# Altium PCB РАЗВОДКА.PcbDoc (part 1 of 2)
Units mm, origin at the board's own origin, x right, y up, seen from the top; angles counter-clockwise.
Board outline 89.98 x 48.1 mm, 2 copper layers (Top Layer, Bottom Layer); 66 components, 44 nets, 297 pads, 65 vias.
Unrouted connection lines stored in the file: 12.
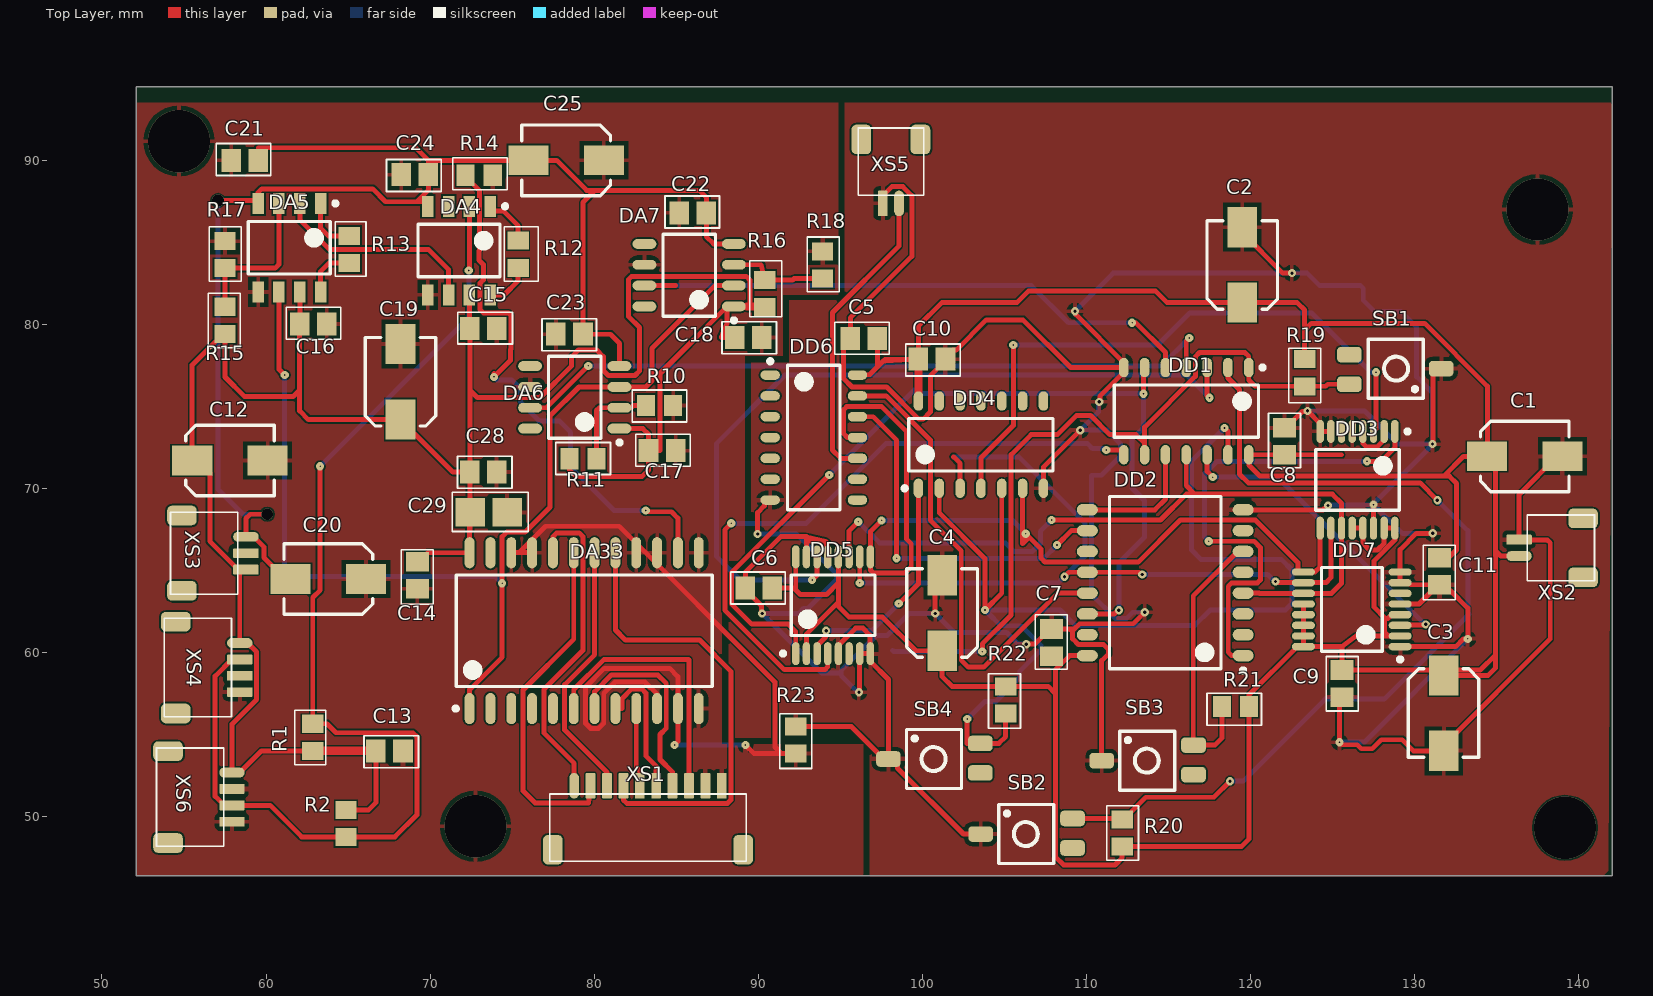
[diagram p0: Top Layer view]
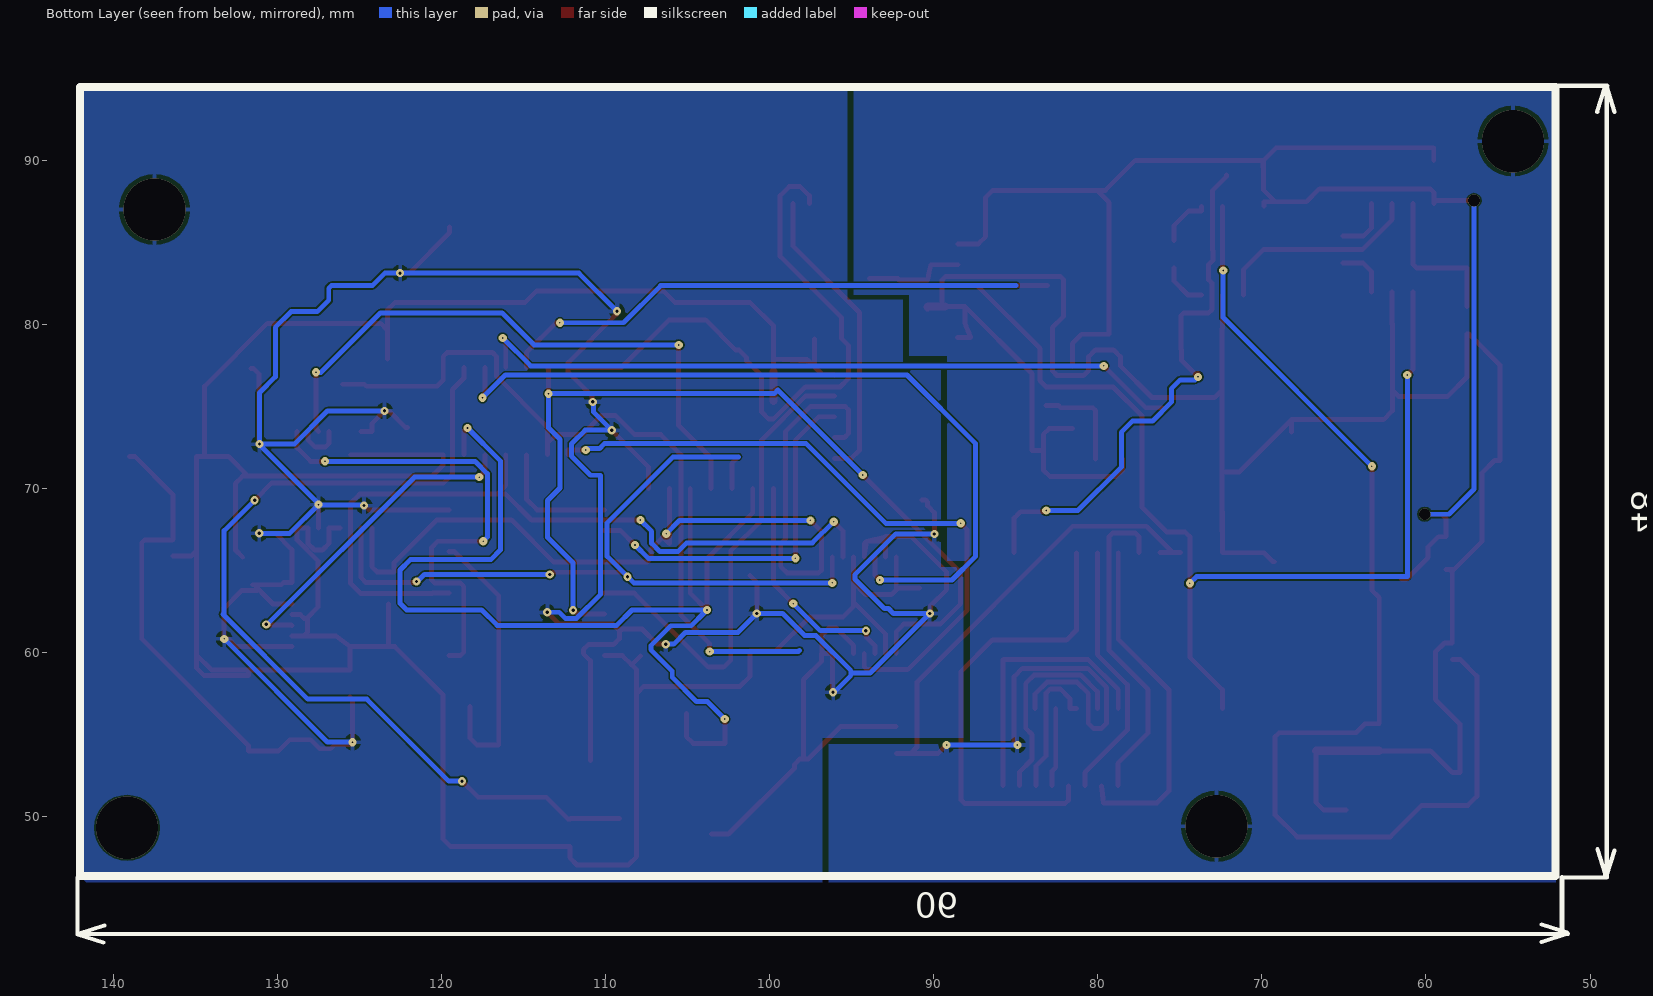
[diagram p1: Bottom Layer view, seen from below]
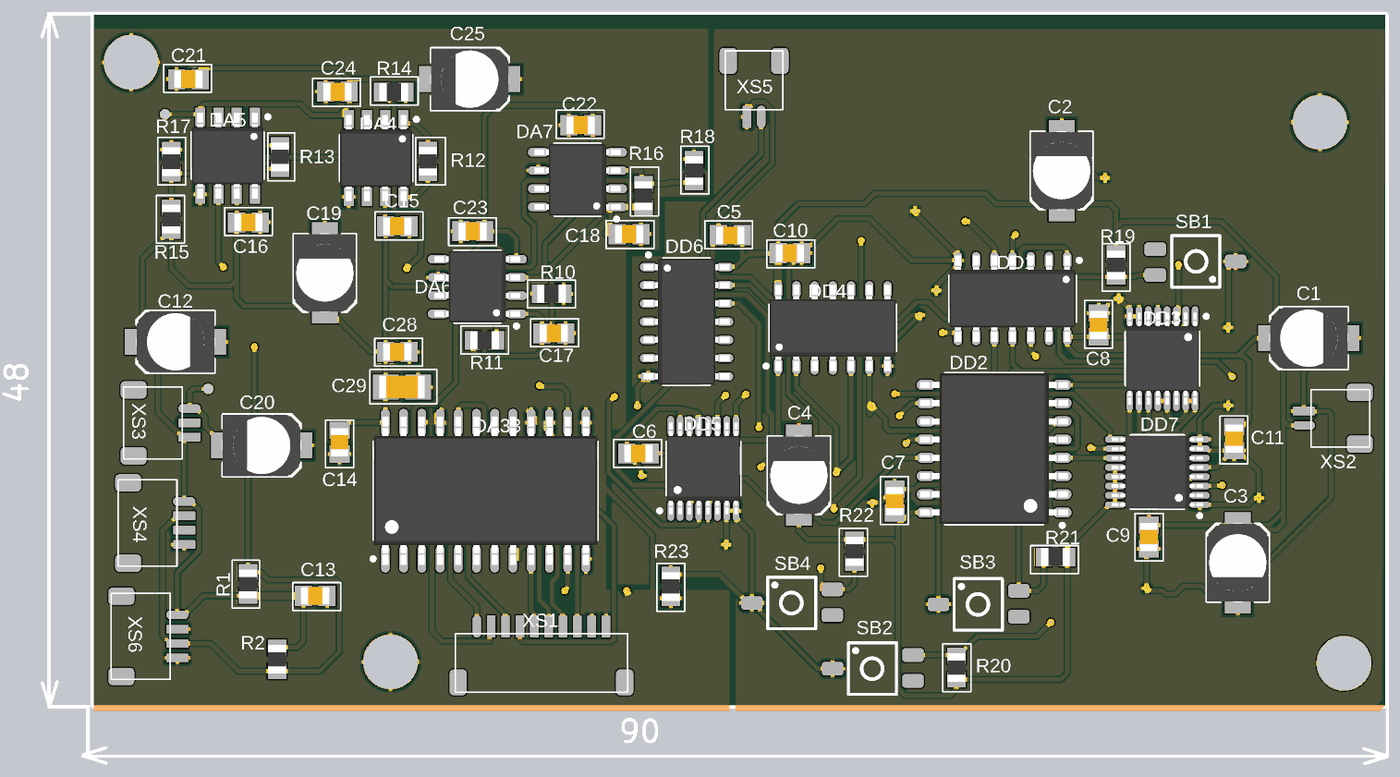
[diagram p3: 3D render of the assembled board from above, using the file's embedded part models]

## Layer stack, top to bottom
Top Solder: solder mask 0.0102, Solder Resist, Dk 3.5
Top Layer: signal copper 0.0356
Dielectric 1: dielectric 0.32, FR-4, Dk 4.8
Bottom Layer: signal copper 0.0356
Bottom Solder: solder mask 0.0102, Solder Resist, Dk 3.5

## Board outline
52.1,46.375 52.1,94.475 142.075,94.475 142.075,46.375

## Design rules (kind name [scope] priority, off if disabled: settings)
Clearance [All] p1: gap=0.1 ignorepadtopadclearanceinfootprint=FALSE except(0: Arc-Hole Track-Hole SMDPad-Hole THPad-Hole Via-Hole Fill-Hole Poly-Hole Region-Hole Text-Hole)
PolygonConnect [All] p1: connectstyle=Relief reliefconductorwidth=0.254 reliefentries=4 polygonreliefangle="90 Angle" airgapwidth=0.254
RoutingVias [All] p1: holewidth=0.1 width=1.27 viastyle="Through Hole" minholewidth=0.1 minwidth=0.1 maxholewidth=5 maxwidth=5
SolderMaskExpansion [All] p1: expansion=0.102 istentingtop=FALSE
Width [All] p1: maxlimit=1 minlimit=0.1 preferedwidth=0.3
30 further rules are at their usual default settings.

## Components (designator, comment, footprint, x,y, rotation, side; value= is the part's Value field where it differs from the comment)
C5 "0.1uF" "Кер.ЧИП конд. 0.1 мкФ X7R 50В 10% 0805" 96.45,79.125 r0 top
C6 "0.1uF" "Кер.ЧИП конд. 0.1 мкФ X7R 50В 10% 0805" 90.05,63.925 r0 top
C7 "0.1uF" "Кер.ЧИП конд. 0.1 мкФ X7R 50В 10% 0805" 107.9,60.6 r270 top
C8 "0.1uF" "Кер.ЧИП конд. 0.1 мкФ X7R 50В 10% 0805" 122.1,72.875 r270 top
C9 "0.1uF" "Кер.ЧИП конд. 0.1 мкФ X7R 50В 10% 0805" 125.6,58.1 r90 top
C10 "0.1uF" "Кер.ЧИП конд. 0.1 мкФ X7R 50В 10% 0805" 100.6,77.875 r180 top
C11 "0.1uF" "Кер.ЧИП конд. 0.1 мкФ X7R 50В 10% 0805" 131.55,64.95 r90 top
C13 "0.1uF" "Кер.ЧИП конд. 0.1 мкФ X7R 50В 10% 0805" 67.525,54 r180 top
C14 "0.1uF" "Кер.ЧИП конд. 0.1 мкФ X7R 50В 10% 0805" 69.225,64.7 r90 top
C15 "0.1uF" "Кер.ЧИП конд. 0.1 мкФ X7R 50В 10% 0805" 73.25,79.75 r180 top
C16 "0.1uF" "Кер.ЧИП конд. 0.1 мкФ X7R 50В 10% 0805" 62.875,80.025 r180 top
C17 "0.1uF" "Кер.ЧИП конд. 0.1 мкФ X7R 50В 10% 0805" 84.15,72.3 r180 top
C18 "0.1uF" "Кер.ЧИП конд. 0.1 мкФ X7R 50В 10% 0805" 89.4,79.2 r180 top
C21 "0.1uF" "Кер.ЧИП конд. 0.1 мкФ X7R 50В 10% 0805" 58.7,90 r180 top
C22 "0.1uF" "Кер.ЧИП конд. 0.1 мкФ X7R 50В 10% 0805" 86.025,86.8 r180 top
C23 "0.1uF" "Кер.ЧИП конд. 0.1 мкФ X7R 50В 10% 0805" 78.5,79.4 r180 top
C24 "0.1uF" "Кер.ЧИП конд. 0.1 мкФ X7R 50В 10% 0805" 69.075,89.125 r180 top
C28 "0.1uF" "Кер.ЧИП конд. 0.1 мкФ X7R 50В 10% 0805" 73.25,71 r180 top
C29 "47uF" "Кер.ЧИП конд. 47 мкФ X5R 20% 10В 1206" 73.575,68.55 r180 top
DA4 "INA118E_BB" "AD620 Инструмент.усилитель" 71.77,84.5 r270 top
DA5 "INA118E_BB_1" "AD620 Инструмент.усилитель" 61.425,84.675 r270 top
DA6 "AD8561" AD8561 78.825,75.55 r180 top
DA7 "AD8561" AD8561 85.8,83 r180 top
DA33 "AD7824" AD7824 79.4,61.325 r90 top
DD1 "И №1 (4 компонента)" 4x2И 116.11,74.71 r270 top
DD2 "НЕ №3 (4 компонента)" CD4044B 114.825,64.25 r180 top
DD3 "Мультиплексор" Мультиплексор 126.55,70.525 r270 top
DD4 "И №2 (2 компонента)" 4x2И 103.59,72.665 r90 top
DD5 "Мультиплексор" Мультиплексор 94.575,62.875 r90 top
DD6 "3И №1" 4x2И 93.4,73.1 r0 top
DD7 "Мультиплексор" Мультиплексор 126.2,62.625 r180 top
R1 "51k" "0.125Вт 0805 51 кОм, 5%, Чип резистор (SMD)" 62.85,54.825 r90 top
R2 "51k" "0.125Вт 0805 51 кОм, 5%, Чип резистор (SMD)" 64.875,49.575 r90 top
R10 "1.5k" "0.125Вт 0805 15Ом, 5%, Чип резистор (SMD)" 84,75.05 r180 top
R11 "8.2k" "0.125Вт 0805 82Ом, 5%, Чип резистор (SMD)" 79.325,71.8 r180 top
R12 "200k" "0.125Вт 0805 200 кОм, 5%, Чип резистор (SMD)" 75.375,84.275 r90 top
R13 "160k" "0.125Вт 0805 160 кОм, 5%, Чип резистор (SMD)" 65.075,84.575 r90 top
R14 "51k" "0.125Вт 0805 51 кОм, 5%, Чип резистор (SMD)" 73,89.1 r0 top
R15 "7.5k" "0.125Вт 0805 75Ом, 5%, Чип резистор (SMD)" 57.5,80.25 r90 top
R16 "1k" "0.125Вт 0805 91Ом, 5%, Чип резистор (SMD)" 90.4,81.875 r90 top
R17 "2.2k" "0.125Вт 0805 22Ом, 5%, Чип резистор (SMD)" 57.5,84.25 r270 top
R18 "56" "0.125Вт 0805 5.1Ом, 5%, Чип резистор (SMD)" 93.925,83.625 r270 top
R19 "10k" "0.125Вт 0805 3 кОм, 5%, Чип резистор (SMD)" 123.325,77.05 r90 top
R20 "10k" "0.125Вт 0805 3 кОм, 5%, Чип резистор (SMD)" 112.2,49 r270 top
R21 "10k" "0.125Вт 0805 3 кОм, 5%, Чип резистор (SMD)" 119.1,56.7 r0 top
R22 "10k" "0.125Вт 0805 3 кОм, 5%, Чип резистор (SMD)" 105.1,57.1 r90 top
R23 "0" "0.125Вт 0805 82Ом, 5%, Чип резистор (SMD)" 92.3,54.65 r270 top
SB1 "Выключатель кнопочный с замыкающим контактом" "Выключатель кнопочный ese21x" 128.9,77.3 r180 top
SB2 "Выключатель кнопочный с замыкающим контактом" "Выключатель кнопочный ese21x" 106.325,48.925 r0 top
SB3 "Выключатель кнопочный с замыкающим контактом" "Выключатель кнопочный ese21x" 113.7,53.4 r0 top
SB4 "Выключатель кнопочный с замыкающим контактом" "Выключатель кнопочный ese21x" 100.7,53.5 r0 top
XS1 "XS 10Pin" CI1108M1H 77.29,49.67 r0 top
XS2 "XS 2Pin (D)" "CI1102M1H  (F)" 138.6,64.375 r90 top
XS3 "XS 3Pin (A)" "CI1108M1H - duplicate" 56.575,68.55 r270 top
XS4 "XS Датчик" CI1102M1H 56.2,62.075 r270 top
XS5 "XS 2Pin_1" "CI1102M1H  (F)" 100.1,89.575 r180 top
XS6 "XS Датчик" CI1102M1H 55.725,54.175 r270 top
ZBOAS336489963 "Comment" "BOASVIEWassembly:Вид спереди для сборочного:4:1:0:101" 85.45,2285.075 r0 top
С1 "1uF" "ECAP SMD, 1 мкФ, 50В, Конденсатор электролитический алюминиевый SMD" 136.75,71.95 r0 top
С2 "1uF" "ECAP SMD, 1 мкФ, 50В, Конденсатор электролитический алюминиевый SMD" 119.525,83.625 r90 top
С3 "1uF" "ECAP SMD, 1 мкФ, 50В, Конденсатор электролитический алюминиевый SMD" 131.8,56.3 r270 top
С4 "1uF" "ECAP SMD, 1 мкФ, 50В, Конденсатор электролитический алюминиевый SMD" 101.225,62.4 r90 top
С12 "1uF" "ECAP SMD, 1 мкФ, 50В, Конденсатор электролитический алюминиевый SMD" 57.8,71.7 r0 top
С19 "1uF" "ECAP SMD, 1 мкФ, 50В, Конденсатор электролитический алюминиевый SMD" 68.2,76.5 r90 top
С20 "1uF" "ECAP SMD, 1 мкФ, 50В, Конденсатор электролитический алюминиевый SMD" 63.8,64.475 r180 top
С25 "1uF" "ECAP SMD, 1 мкФ, 50В, Конденсатор электролитический алюминиевый SMD" 78.3,90 r180 top

## Footprints (in the part's own frame and the unit in brackets; to place one, negate y for a bottom-side part, rotate by r counter-clockwise, add the part's x,y. Pads: shape width x height; smd on the part's side, far side on the other; paste and mask are expansions set on the pad)
"0.125Вт 0805 3 кОм, 5%, Чип резистор (SMD)" [mm]
  rect 1.1x1.3 smd: 1(-0.825,0) 2(0.825,0)
  body extent -1,-0.63 1,0.63, height 0.5
"0.125Вт 0805 5.1Ом, 5%, Чип резистор (SMD)" [mm]
  rect 1.1x1.3 smd: 1(-0.825,0) 2(0.825,0)
  body extent -1,-0.63 1,0.63, height 0.5
"0.125Вт 0805 15Ом, 5%, Чип резистор (SMD)" [mm]
  rect 1.1x1.3 smd: 1(-0.825,0) 2(0.825,0)
  body extent -1,-0.63 1,0.63, height 0.5
"0.125Вт 0805 22Ом, 5%, Чип резистор (SMD)" [mm]
  rect 1.1x1.3 smd: 1(-0.825,0) 2(0.825,0)
  body extent -1,-0.63 1,0.63, height 0.5
"0.125Вт 0805 51 кОм, 5%, Чип резистор (SMD)" [mm]
  rect 1.1x1.3 smd: 1(-0.825,0) 2(0.825,0)
  body extent -1,-0.63 1,0.63, height 0.5
"0.125Вт 0805 75Ом, 5%, Чип резистор (SMD)" [mm]
  rect 1.1x1.3 smd: 1(-0.825,0) 2(0.825,0)
  body extent -1,-0.63 1,0.63, height 0.5
"0.125Вт 0805 82Ом, 5%, Чип резистор (SMD)" [mm]
  rect 1.1x1.3 smd: 1(-0.825,0) 2(0.825,0)
  body extent -1,-0.63 1,0.63, height 0.5
"0.125Вт 0805 91Ом, 5%, Чип резистор (SMD)" [mm]
  rect 1.1x1.3 smd: 1(-0.825,0) 2(0.825,0)
  body extent -1,-0.63 1,0.63, height 0.5
"0.125Вт 0805 160 кОм, 5%, Чип резистор (SMD)" [mm]
  rect 1.1x1.3 smd: 1(-0.825,0) 2(0.825,0)
  body extent -1,-0.63 1,0.63, height 0.5
"0.125Вт 0805 200 кОм, 5%, Чип резистор (SMD)" [mm]
  rect 1.1x1.3 smd: 1(-0.825,0) 2(0.825,0)
  body extent -1,-0.63 1,0.63, height 0.5
4x2И [mm] "MC74ACT08DG, Логический элемент И, 74ACT08, 2 входа, 24мА, 4.5В до 5.5В, SOIC-14"
  oval 1.18x0.58 smd: 1(-2.66,3.81) 2(-2.66,2.54) 3(-2.66,1.27) 4(-2.66,0) 5(-2.66,-1.27) 6(-2.66,-2.54) 7(-2.66,-3.81) 8(2.66,-3.81) 9(2.66,-2.54) 10(2.66,-1.27) 11(2.66,0) 12(2.66,1.27) 13(2.66,2.54) 14(2.66,3.81)
  silkscreen extent -2.78,-4.4 1.6,4.78, body extent -3,-4.4 3,4.4, height 1.75
"AD620 Инструмент.усилитель" [mm] "SOIC, 8-Leads, Body 4,90x3,90mm, Pitch 1,27mm, IPC Medium Density"
  rect 1.28x0.7 smd: 1(-2.7,1.905) 2(-2.7,0.635) 3(-2.7,-0.635) 4(-2.7,-1.905) 5(2.7,-1.905) 6(2.7,-0.635) 7(2.7,0.635) 8(2.7,1.905)
  silkscreen extent -2.82,-2.5 1.6,2.93, body extent -3,-2.5 3,2.5, height 1.75
AD7824 [mm] "SOIC, 24-Leads, Body 15,40x7,50mm, Pitch 1,27mm, IPC Medium Density"
  oval 1.9x0.6 smd: 1(-4.75,6.985) 2(-4.75,5.715) 3(-4.75,4.445) 4(-4.75,3.175) 5(-4.75,1.905) 6(-4.75,0.635) 7(-4.75,-0.635) 8(-4.75,-1.905) 9(-4.75,-3.175) 10(-4.75,-4.445) 11(-4.75,-5.715) 12(-4.75,-6.985) 13(4.75,-6.985) 14(4.75,-5.715) 15(4.75,-4.445) 16(4.75,-3.175) 17(4.75,-1.905) 18(4.75,-0.635) 19(4.75,0.635) 20(4.75,1.905) 21(4.75,3.175) 22(4.75,4.445) 23(4.75,5.715) 24(4.75,6.985)
  silkscreen extent -4.87,-7.8 3.4,7.96, body extent -5.16,-7.8 5.16,7.8, height 2.65
AD8561 [mm] "SOIC, 8-Leads, Body 4,90x3,90mm, Pitch 1,27mm, IPC Medium Density"
  oval 1.45x0.6 smd: 1(-2.725,1.905) 2(-2.725,0.635) 3(-2.725,-0.635) 4(-2.725,-1.905) 5(2.725,-1.905) 6(2.725,-0.635) 7(2.725,0.635) 8(2.725,1.905)
  silkscreen extent -2.85,-2.5 1.6,2.88, body extent -3,-2.5 3,2.5, height 1.75
"BOASVIEWassembly:Вид спереди для сборочного:4:1:0:101" [mm]
CD4044B [mm] "SOIC, 16-Leads, Body 10,30x7,50mm, Pitch 1,27mm, IPC Medium Density"
  oval 1.28x0.7 smd: 1(-4.75,4.445) 2(-4.75,3.175) 3(-4.75,1.905) 4(-4.75,0.635) 5(-4.75,-0.635) 6(-4.75,-1.905) 7(-4.75,-3.175) 8(-4.75,-4.445) 9(4.75,-4.445) 10(4.75,-3.175) 11(4.75,-1.905) 12(4.75,-0.635) 13(4.75,0.635) 14(4.75,1.905) 15(4.75,3.175) 16(4.75,4.445)
  silkscreen extent -4.88,-5.25 3.4,5.47, body extent -5.16,-5.25 5.16,5.25, height 2.65
CI1102M1H [mm]
  oval 0.6x1.55 smd: 1(1.5,2.2)
  rrect20% 0.6x1.55 smd: 2(2.5,2.2) 3(3.5,2.2) 4(4.5,2.2)
  rrect50% 1.2x1.8 smd: 5(0.2,-1.7) 6(5.8,-1.7)
  silkscreen extent 0,-2.4 6,1.7
"CI1102M1H  (F)" [mm]
  oval 0.6x1.55 smd: 1(1.5,2.2)
  rrect20% 0.6x1.55 smd: 2(2.5,2.2)
  rrect50% 1.2x1.8 smd: 3(0.2,-1.7) 4(3.8,-1.7)
  silkscreen extent 0,-2.4 4,1.7
CI1108M1H [mm]
  oval 0.6x1.55 smd: 1(1.5,2.2)
  rrect20% 0.6x1.55 smd: 2(2.5,2.2) 3(3.5,2.2) 4(4.5,2.2) 5(5.5,2.2) 6(6.5,2.2) 7(7.5,2.2) 8(8.5,2.2) 9(9.5,2.2) 10(10.5,2.2)
  rrect50% 1.2x1.8 smd: 11(0.2,-1.7) 12(11.8,-1.7)
  silkscreen extent 0,-2.4 12,1.7
"CI1108M1H - duplicate" [mm]
  rrect20% 0.6x1.55 smd: 1(3.5,2.2) 2(2.5,2.2)
  oval 0.6x1.55 smd: 3(1.5,2.2)
  rrect50% 1.2x1.8 smd: 4(0.2,-1.7) 5(4.8,-1.7)
  silkscreen extent 0,-2.4 5,1.7
"ECAP SMD, 1 мкФ, 50В, Конденсатор электролитический алюминиевый SMD" [mm] "ECAP SMD, 1 мкФ, 50В, Конденсатор электролитический алюминиевый SMD"
  rect 2.45x1.8 smd: 1(-2.3,0) 2(2.3,0)
  silkscreen extent -2.7,-2.15 2.7,2.15, body extent -2.75,-2.15 2.75,2.15, height 5.4
"Выключатель кнопочный ese21x" [mm] "SOTFL, 3-Leads, Body 3,62x1,60mm, Pitch 1,50mm, IPC Medium Density"
  rrect50% 1.5x0.95 smd: 1(-2.75,0) 2(2.85,0.95) 3(2.85,-0.85)
  silkscreen extent -1.65,-1.8 1.7,1.8
"Кер.ЧИП конд. 0.1 мкФ X7R 50В 10% 0805" [mm]
  rect 1.2x1.4 smd: 1(-0.825,0) 2(0.825,0)
  body extent -1,-0.63 1,0.63, height 1.3
"Кер.ЧИП конд. 47 мкФ X5R 20% 10В 1206" [mm] "Кер.ЧИП конд. 47 мкФ X5R 20% 10В 1206"
  rect 1.8x1.75 smd: 1(-1.125,0) 2(1.125,0)
  body extent -1.6,-0.8 1.6,0.8, height 1.5
Мультиплексор [mm] "TSOP, 16-Leads, Body 5,00x4,40mm, Pitch 0,65mm, IPC Medium Density"
  oval 1.4x0.45 smd: 1(-2.95,2.275) 2(-2.95,1.625) 3(-2.95,0.975) 4(-2.95,0.325) 5(-2.95,-0.325) 6(-2.95,-0.975) 7(-2.95,-1.625) 8(-2.95,-2.275) 9(2.95,-2.275) 10(2.95,-1.625) 11(2.95,-0.975) 12(2.95,-0.325) 13(2.95,0.325) 14(2.95,0.975) 15(2.95,1.625) 16(2.95,2.275)
  silkscreen extent -3.07,-2.55 1.85,3.17, body extent -3.2,-2.55 3.2,2.55, height 0.95

## Part data
C5 C6 C7 C8 C9 C10 C11 C13 C14 C15 C16 C17 C18 C21 C22 C23 C24 C28: library part "Кер.ЧИП конд. 0.1 мкФ X7R 50В 10% 0805", "Кер.ЧИП конд. 0.1 мкФ X7R 50В 10% 0805"
C29: library part "Кер.ЧИП конд. 47 мкФ X5R 20% 10В 1206", "Кер.ЧИП конд. 47 мкФ X5R 20% 10В 1206"
DD3 DD5 DD7: "74HC40510"
R1 R2 R14: library part "0.125Вт 0805 51 кОм, 5%, Чип резистор (SMD)", "0.125Вт 0805 51 кОм, 5%, Чип резистор (SMD)"
R10: library part "0.125Вт 0805 15Ом, 5%, Чип резистор (SMD)_2_1", "0.125Вт 0805 15Ом, 5%, Чип резистор (SMD)"
R11 R23: library part "0.125Вт 0805 82Ом, 5%, Чип резистор (SMD)_2_2", "0.125Вт 0805 82Ом, 5%, Чип резистор (SMD)"
R12: library part "0.125Вт 0805 200 кОм, 5%, Чип резистор (SMD)", "0.125Вт 0805 200 кОм, 5%, Чип резистор (SMD)"
R13: library part "0.125Вт 0805 160 кОм, 5%, Чип резистор (SMD)", "0.125Вт 0805 160 кОм, 5%, Чип резистор (SMD)"
R15: library part "0.125Вт 0805 75Ом, 5%, Чип резистор (SMD)", "0.125Вт 0805 75Ом, 5%, Чип резистор (SMD)"
R16: library part "0.125Вт 0805 91кОм, 5%, Чип резистор (SMD)_1", "0.125Вт 0805 91Ом, 5%, Чип резистор (SMD)"
R17: library part "0.125Вт 0805 22Ом, 5%, Чип резистор (SMD)", "0.125Вт 0805 22Ом, 5%, Чип резистор (SMD)"
R18: library part "0.125Вт 0805 5.1Ом, 5%, Чип резистор (SMD)_2", "0.125Вт 0805 5.1Ом, 5%, Чип резистор (SMD)"
R19 R20 R21 R22: library part "0.125Вт 0805 5кОм, 5%, Чип резистор (SMD)", "0.125Вт 0805 5кОм, 5%, Чип резистор (SMD)"
С1 С2 С3 С4 С12 С19 С20 С25: library part "ECAP SMD, 1 мкФ, 50В, Конденсатор электролитический алюминиевый SMD", "ECAP SMD, 1 мкФ, 50В, Конденсатор электролитический алюминиевый SMD"

## Via types
v1: diameter 0.5, hole 0.1, Top Layer to Bottom Layer, 37 vias
v2: diameter 0.5, hole 0.2, Top Layer to Bottom Layer, 22 vias
v3: diameter 3.8, hole 3.8, Top Layer to Bottom Layer, 4 vias
v4: diameter 0.711, hole 0.711, Top Layer to Bottom Layer, 2 vias

## Nets (pads, with @x,y where several pads share a name; then routed paths per layer and width w, separated by ;. In a path a pad name is that pad's centre, name@x,y a point inside that pad or via, vN(x,y) a via of type N, cw(c..) or ccw(c..) an arc to the next point about the centre after c; other vN are vias at no path point)
"+5V A": C13.2 C14.2 C15.2 C16.2 C17.2 C18.2 C28.2 C29.2 DA4.7 DA5.7 DA6.1 DA7.1 DA33.24 R1.1 R2.2 R11.2 R15.1 R16.1 XS3.1 XS4.1 XS6.1 С12.1 С19.1 | length 149.5
  Top Layer w0.3: XS3.1@58.775,65.05 XS3.1@58.55,65.05 ; DA5.7@62.06,81.975 62.06,80.025 C16.2@62.05,80.025 62.05,75.997 ; R1.1@62.85,54 59.725,54 58.4,52.675 XS6.1@57.925,52.675 57.925,55.628 59.425,57.128 59.425,60.025 58.875,60.575 XS4.1@58.4,60.575 58.4,64.9 XS3.1@58.55,65.05 ; R2.2@64.875,50.4 66.26,50.4 66.7,50.84 C13.2@66.7,54 ; С19.1@68.2,73.432 С19.1@68.2,74.193 ; С19.1@68.2,74.2 С19.1@68.2,74.193 ; C14.2@69.225,65.525 69.325,65.525 69.875,66.075 DA33.24@72.415,66.075 ; DA4.7@72.405,81.8 72.405,79.75 C15.2@72.425,79.75 72.425,75.997 ; R11.2@78.5,71.8 78.5,71.12 78.906,70.714 82.919,70.714 83.325,71.12 C17.2@83.325,72.3 ; DA6.1@81.55,73.645 82.98,73.645 83.325,73.3 C17.2@83.325,72.3 ; C18.2@88.575,79.2 87.754,79.2 87.87,79.485 88.113,80.086 DA7.1@88.113,81.095 ; XS3.1@58.55,65.05 58.3,65.05 56.575,66.775 56.575,70.95 55.825,71.7 С12.1@55.5,71.7 55.5,77.525 57.4,79.425 R15.1@57.5,79.425 57.5,76.79 58.699,75.59 61.644,75.59 62.05,75.997 ; 62.05,75.997 62.05,74.729 62.586,74.193 С19.1@68.2,74.193 ; С19.1@68.2,74.193 71.393,71 C28.2@72.425,71 ; DA33.24@72.415,66.075 72.415,68.55 C29.2@72.445,68.55 ; DA33.24@72.415,66.075 C29.2@72.445,68.55 ; C28.2@72.425,71 72.425,75.997 ; C28.2@72.425,71 72.425,69.011 72.45,68.986 C29.2@72.45,68.55 C29.2@72.445,68.55 ; 72.425,75.997 72.882,75.54 76.708,75.54 78.638,77.47 78.638,78.029 79.045,78.435 80.162,78.435 80.569,78.029 80.569,77.191 80.874,76.886 82.499,76.886 82.779,77.165 82.779,79.807 82.093,80.493 82.093,82.728 82.296,82.931 89.271,82.931 89.5,82.702 89.5,81.28 89.315,81.095 DA7.1@88.525,81.095 DA7.1@88.113,81.095 ; C17.2@83.325,72.3 84.023,72.3 84.023,77.006 DA7.1@88.113,81.095
  Top Layer w0.5: R1.1@62.85,54 C13.2@66.7,54 ; 89.315,81.095 90.355,81.095 R16.1@90.4,81.05
"+5V D": C5.2 C6.2 C7.2 C8.2 C9.2 C10.2 C11.2 DD1.14 DD2.16 DD3.2 DD3.4 DD3.5 DD3.12 DD3.13 DD3.15 DD3.16 DD4.14 DD5.2 DD5.12 DD5.16 DD6.14 DD7.2 DD7.4 DD7.12 DD7.13 DD7.14 DD7.15 DD7.16 R19.2 R20.2 R21.2 R22.2 XS2.1 С1.1 С2.1 С3.1 С4.1 | length 210.3
  Top Layer w0.3: C6.2@90.875,63.925 92.18,63.925 92.3,63.805 ; DD5.16@92.3,65.825 92.3,63.805 ; DD5.2@92.95,59.925 92.95,61.11 94.9,63.06 ; DD5.12@94.9,65.825 94.9,64.25 ; DD6.14@96.06,76.91 96.828,76.953 97.275,77.4 ; C5.2@97.275,79.125 97.275,77.4 ; 99.775,77.117 C10.2@99.775,77.875 ; C7.2@107.9,59.775 C7.2@108.433,59.242 ; DD2.16@110.075,59.805 108.996,59.805 C7.2@108.433,59.242 ; DD7.12@123.25,62.95 123.266,62.95 123.266,62.3 DD7.13@123.25,62.3 DD7.14@123.25,61.65 DD7.15@123.25,61 DD7.16@123.25,60.35 ; R19.2@123.325,77.875 123.325,79.654 ; 125.578,72.05 C8.2@122.1,72.05 DD1.14@119.92,72.05 119.92,71.425 120.602,70.743 131.805,70.743 ; DD3.12@126.225,67.575 DD3.13@126.875,67.575 126.875,66.65 127.281,66.243 127.769,66.243 128.175,66.65 DD3.15@128.175,67.575 DD3.16@128.825,67.575 128.825,66.853 127.559,65.587 127.559,62.757 128.219,62.097 128.194,62.071 ; DD3.4@126.875,73.475 126.875,72.746 127.104,72.517 127.718,72.517 128.175,72.974 DD3.2@128.175,73.475 ; DD7.2@129.15,61 128.422,61 ; DD7.4@129.15,62.3 128.634,62.3 128.406,62.071 128.194,62.071 ; C11.2@132.145,65.8 132.588,66.243 132.588,70.307 132.152,70.743 131.805,70.743 ; XS2.1@136.4,65.875 135.293,65.875 134.976,66.192 ; 92.3,63.805 92.575,63.529 94.179,63.529 94.9,64.25 ; 94.9,63.06 94.9,64.25 ; 94.9,63.06 94.9,62.809 95.555,62.154 97.587,62.154 99.641,60.1 С4.1@101.225,60.1 101.225,58.522 101.822,57.925 R22.2@105.1,57.925 107.696,57.925 108.128,57.493 ; 97.275,77.4 97.643,77.768 ; 97.643,77.768 97.75,77.875 C10.2@99.775,77.875 ; 97.643,77.768 97.755,77.774 C10.2@99.775,77.875 ; C10.2@99.775,77.875 99.775,79.9 101.2,81.325 105.781,81.325 106.481,82.025 114.244,82.025 114.944,81.325 С2.1@119.525,81.325 122.874,81.325 123.325,80.874 123.325,79.654 ; 108.128,57.493 108.128,58.937 C7.2@108.433,59.242 ; 108.128,57.493 108.128,47.549 108.636,47.041 111.76,47.041 112.2,47.481 R20.2@112.2,48.175 119.482,48.175 119.925,48.618 R21.2@119.925,56.7 119.925,57.404 122.871,60.35 DD7.16@123.25,60.35 ; DD7.16@123.25,60.35 125.6,60.35 ; 123.325,79.654 123.731,80.061 130.639,80.061 134.47,76.23 С1.1@134.47,71.95 ; 125.6,60.35 126.456,61 128.422,61 ; 125.6,60.35 C9.2@125.6,58.925 С3.1@131.8,58.925 ; 128.194,62.071 128.194,61.229 128.422,61 ; С3.1@131.8,58.925 134.033,58.925 134.976,59.868 ; С3.1@131.8,58.925 С3.1@131.8,58.6 134.518,58.6 134.976,59.057 134.976,59.868 ; 131.805,70.743 133.012,71.95 С1.1@134.45,71.95 С1.1@134.47,71.95 ; С1.1@134.47,71.95 134.976,71.95 134.976,66.192 ; 134.976,59.868 134.976,66.192
  Top Layer w0.5: 99.775,77.117 DD4.14@99.78,75.325
"-5V A": C21.1 C22.1 C23.1 C24.1 DA4.4 DA5.4 DA6.4 DA7.4 XS3.3 С20.2 С25.2 | length 92.3
  Top Layer w0.3: v4(57.075,87.55) 59.345,87.55 DA5.4@59.52,87.375 59.52,88.044 59.741,88.265 66.501,88.265 67.288,87.478 69.189,87.478 ; C21.1@59.525,90 59.525,90.767 69.133,90.767 69.951,89.949 ; v4(60.075,68.425) 59.039,68.425 58.775,68.161 XS3.3@58.775,67.05 59.25,67.05 59.866,66.434 59.866,65.784 61.175,64.475 С20.2@61.5,64.475 ; DA4.4@69.865,87.2 69.865,87.478 69.189,87.478 ; DA6.4@81.55,77.455 81.55,78.851 81.001,79.4 C23.1@79.325,79.4 79.325,87.439 80.061,88.175 ; DA7.4@88.525,84.905 87.289,84.905 86.85,85.344 C22.1@86.85,86.8 86.85,87.75 86.425,88.175 80.061,88.175 ; 69.189,87.478 69.9,88.189 C24.1@69.9,89.125 ; C24.1@69.9,89.125 69.951,89.949 ; C24.1@69.9,89.125 69.9,89.898 69.951,89.949 ; 69.951,89.949 70.002,90 С25.2@76,90 77.725,90 79.55,88.175 80.061,88.175
  Bottom Layer w0.3: v4(57.075,87.55) 57.075,69.95 58.6,68.425 v4(60.075,68.425)
A: C13.1 C14.1 C15.1 C16.1 C17.1 C18.1 C21.2 C22.2 C23.2 C24.2 C28.1 C29.1 DA4.5 DA5.5 DA6.6 DA7.6 DA33.10 DA33.11 DA33.12 DA33.13 DA33.15 DA33.16 DA33.21 DA33.22 R10.1 R14.2 R17.1 R18.1 R23.2 XS1.9 XS1.10 XS3.2 XS4.3 XS4.4 XS6.2 XS6.4 С12.2 С19.2 С20.1 С25.1 | length 54.3
  Top Layer w0.3: DA33.22@74.955,66.075 74.955,66.091 75.438,66.091 ; DA33.21@76.225,66.075 76.225,66.091 75.438,66.091 ; DA33.10@83.845,56.575 83.845,57.455 83.108,58.191 81.28,58.191 80.594,57.506 80.594,55.677 80.289,55.372 79.781,55.372 79.477,55.677 79.477,57.877 80.629,59.03 84.607,59.03 85.115,58.522 DA33.11@85.115,56.575 85.115,54.559 v1(84.912,54.356) ; v1(89.23,54.356) 89.761,53.825 91.44,53.825 ; R23.2@92.3,53.825 91.44,53.825 ; 75.438,66.091 77.038,67.691 81.534,67.691 91.034,58.191 91.034,54.231 91.44,53.825
  Bottom Layer w0.3: v1(84.912,54.356) v1(89.23,54.356)
  other v3: 72.775,49.4 54.7,91.175
D: C5.1 C6.1 C7.1 C8.1 C9.1 C10.1 C11.1 DD1.7 DD2.8 DD3.7 DD3.8 DD3.14 DD4.7 DD5.7 DD5.8 DD5.13 DD5.15 DD6.7 DD7.1 DD7.7 DD7.8 R23.1 SB1.1 SB2.1 SB3.1 SB4.1 XS2.2 XS5.2 С1.2 С2.2 С3.2 С4.2 | length 302
  Top Layer w0.3: v2(89.975,67.225) 89.975,68.525 90.386,68.936 90.386,69.161 90.516,69.29 DD6.7@90.74,69.29 ; v2(90.25,62.375) 90.212,62.413 90.212,62.838 89.225,63.825 C6.1@89.225,63.925 89.225,64.897 91.384,67.056 92.95,67.056 ; R23.1@92.3,55.475 95.7,55.475 97.675,53.5 SB4.1@97.95,53.5 ; DD5.15@92.95,65.825 92.95,67.056 ; 94.9,59.925 94.9,60.422 95.953,61.475 96.399,61.475 96.821,61.053 96.821,59.954 DD5.8@96.85,59.925 ; v2(96.15,57.575) 96.175,57.6 96.175,59.9 DD5.7@96.2,59.925 DD5.8@96.85,59.925 ; XS5.2@97.6,87.375 97.6,87.85 98.15,88.4 98.828,88.4 99.375,87.853 99.375,84.15 95.625,80.4 C5.1@95.625,79.125 95.22,78.72 95.22,76.686 95.726,76.18 97.842,76.18 99.797,74.225 100.074,74.225 100.51,74.661 100.51,76.86 101.425,77.775 C10.1@101.425,77.875 101.425,77.975 101.875,78.425 102.075,78.425 103.925,80.275 106.15,80.275 109.055,77.37 DD1.7@112.3,77.37 ; v2(100.8,62.375) 100.8,64.275 С4.2@101.225,64.7 ; SB2.1@103.575,48.925 102.525,48.925 98.496,52.954 98.496,53.182 98.178,53.5 SB4.1@97.95,53.5 ; v2(106.35,60.5) 106.875,60.5 107.8,61.425 C7.1@107.9,61.425 109.009,61.425 ; DD4.7@107.4,70.005 107.4,71.3 v2(109.65,73.55) ; v2(109.325,80.8) 109.363,80.762 109.363,80.607 112.3,77.67 DD1.7@112.3,77.37 ; v2(110.8,75.275) 110.838,75.313 110.838,75.608 112.3,77.07 DD1.7@112.3,77.37 ; SB3.1@110.95,53.4 110.95,59.5 111.376,59.926 111.376,60.174 111.075,60.475 109.536,60.475 109.185,60.826 109.185,61.249 109.009,61.425 ; v2(113.575,62.45) 112.87,61.745 109.606,61.745 109.286,61.425 109.009,61.425 ; С2.2@119.525,85.925 119.525,85.6 122,83.125 v2(122.55,83.125) ; DD2.8@119.575,68.695 124.441,68.695 124.696,68.95 v2(124.75,68.95) ; C8.1@122.1,73.7 122.2,73.7 123.187,74.687 123.462,74.687 v2(123.5,74.725) 124.275,73.95 DD3.8@124.275,73.475 DD3.7@124.925,73.475 ; C9.1@125.6,57.275 125.45,57.125 v1(125.45,54.525) 125.604,54.371 126.535,54.371 126.781,54.125 127.45,54.125 128,54.675 129.275,54.675 129.95,54 С3.2@131.8,54 131.8,54.325 138.3,60.825 138.3,66.674 138.124,66.85 136.425,66.85 XS2.2@136.4,66.875 136.4,69.625 138.725,71.95 С1.2@139.05,71.95 ; DD3.14@127.525,67.575 v1(127.525,69.012) ; DD7.1@129.15,60.35 132.538,60.35 133.013,60.825 v1(133.275,60.825) 133.275,62.7 132.189,63.786 C11.1@131.264,63.786 ; 129.15,62.95 130.3,62.95 131,63.65 131,63.675 C11.1@131.45,64.125 ; v2(131.125,72.7) 131.163,72.738 131.163,76.982 131.482,77.3 SB1.1@131.65,77.3 ; v2(131.14,67.259) 130.14,67.259 129.15,66.269 DD7.8@129.15,64.9 DD7.7@129.15,64.25 129.666,64.25 129.791,64.125 C11.1@131.45,64.125 ; C11.1@131.55,64.125 C11.1@131.45,64.125 ; 92.95,67.056 93.066,66.777 94.123,66.777 ; 92.95,67.056 94.123,66.777 ; 94.123,66.777 94.25,66.65 DD5.13@94.25,65.825 94.123,66.777 ; DD5.8@96.85,59.925 96.85,59.45 97.95,58.35 SB4.1@97.95,53.5
  Bottom Layer w0.3: v2(89.975,67.225) 92.325,67.225 94.826,64.724 94.826,64.476 93.025,62.675 92.775,62.675 92.475,62.375 v2(90.25,62.375) 93.883,58.742 95.075,58.742 ; v2@96.1,57.55 95.075,58.575 95.075,58.742 ; v2(106.35,60.5) 105.875,60.5 105.15,61.225 101.95,61.225 v2(100.8,62.375) 99.227,62.375 97.882,61.031 97.197,61.031 95.075,58.909 95.075,58.742 ; v2(109.325,80.8) 111.65,83.125 v2(122.55,83.125) 123.475,83.125 124.101,82.499 124.225,82.375 126.724,82.375 126.9,82.199 126.9,81.475 127.6,80.775 129.2,80.775 130.15,79.825 130.15,76.8 131.125,75.825 v2(131.125,72.7) ; v2(110.8,75.275) 110.762,75.237 110.762,74.662 v2(109.65,73.55) 111.267,73.55 112.112,72.706 112.112,71.973 110.939,70.8 110.325,70.8 110.325,63.543 111.793,62.075 112.469,62.075 112.844,62.45 v2(113.575,62.45) ; v2(123.5,74.725) 126.975,74.725 129,72.7 v2(131.125,72.7) ; v2(124.75,68.95) 124.781,68.981 127.494,68.981 v1(127.525,69.012) ; v1(125.45,54.525) 126.975,54.525 v1(133.275,60.825) ; v2(131.14,67.259) 129.278,67.259 v1(127.525,69.012) ; v1(127.525,69.012) 127.525,69.056 131.125,72.656 v2(131.125,72.7)
  other v3: 137.525,87
NetDA4_1: DA4.1 R12.2 | length 3.3
  Top Layer w0.3: DA4.1@73.675,87.2 73.675,86.919 74.461,86.919 75.375,86.004 R12.2@75.375,85.1
NetDA4_2: DA4.2 R1.2 R2.1 XS4.2 XS6.3 | length 70.1
  Top Layer w0.3: XS4.2@58.4,59.575 57.925,59.575 56.9,58.55 56.9,51.225 57.45,50.675 XS6.3@57.925,50.675 60.25,50.675 62.175,48.75 R2.1@64.875,48.75 67.858,48.75 69.207,50.099 69.207,54.849 68.953,55.103 64.268,55.103 63.72,55.65 R1.2@62.85,55.65 62.85,63.345 63.297,63.791 v1(63.297,71.349) ; v1(72.365,83.287) 72.405,83.327 DA4.2@72.405,87.2
  Bottom Layer w0.3: v1(63.297,71.349) 72.365,80.416 v1(72.365,83.287)
NetDA4_6: DA4.6 DA5.2 | length 12.9
  Top Layer w0.3: DA5.2@62.06,87.375 62.06,86.378 63.881,84.557 69.916,84.557 71.135,83.337 DA4.6@71.135,81.8
NetDA4_8: DA4.8 R12.1 | length 2.9
  Top Layer w0.3: DA4.8@73.675,81.8 73.675,81.788 74.511,81.788 75.375,82.652 R12.1@75.375,83.45
NetDA5_1: DA5.1 R13.2 | length 3.4
  Top Layer w0.3: DA5.1@63.33,87.375 63.33,85.87 63.8,85.4 R13.2@65.075,85.4
NetDA5_3: DA5.3 R15.2 R17.2 | length 9.5
  Top Layer w0.3: R15.2@57.5,81.075 R17.2@57.5,83.425 60.554,83.425 60.79,83.661 DA5.3@60.79,87.375
NetDA5_6: DA5.6 DA6.3 DA7.2 DA33.1 | length 67.1
  Top Layer w0.3: DA5.6@60.79,81.975 60.79,77.259 v1(61.138,76.911) ; DA33.1@72.415,56.575 72.415,57.734 74.397,59.715 v1(74.397,64.211) 74.397,67.056 74.676,67.335 75.794,67.335 77.318,68.859 77.318,74.422 79.081,76.185 DA6.3@81.55,76.185 83.16,76.185 83.538,76.563 83.538,78.538 87.365,82.365 DA7.2@88.525,82.365
  Bottom Layer w0.3: v1(61.138,76.911) 61.138,64.618 73.99,64.618 v1(74.397,64.211)
NetDA5_8: DA5.8 R13.1 | length 3.2
  Top Layer w0.3: DA5.8@63.33,81.975 63.33,83.23 63.85,83.75 R13.1@65.075,83.75
NetDA6_2: DA6.2 R10.2 R11.1 | length 6.1
  Top Layer w0.3: R11.1@80.15,71.8 80.15,74.75 80.315,74.915 DA6.2@81.55,74.915 82.271,74.915 82.406,75.05 R10.2@83.175,75.05
NetDA6_7: DA6.7 DD1.4 | length 43.8
  Top Layer w0.3: DA6.7@76.1,74.915 77.089,74.915 v1(79.644,77.47) ; DD1.4@116.11,77.37 116.11,78.985 v1(116.296,79.172)
  Bottom Layer w0.3: v1(79.644,77.47) 114.595,77.47 v1(116.296,79.172)
NetDA7_3: DA7.3 R16.2 R18.2 | length 6.2
  Top Layer w0.3: DA7.3@88.525,83.635 90.19,83.635 R16.2@90.4,82.7 92.1,82.7 92.2,82.8 R18.2@93.925,82.8
NetDA7_7: DA7.7 DD1.5 | length 34.4
  Top Layer w0.3: DA7.7@83.075,82.365 84.981,82.365 ; v1(112.805,80.1) 113.032,80.1 114.84,78.292 DD1.5@114.84,77.37
  Bottom Layer w0.3: 84.981,82.365 106.66,82.365 108.925,80.1 v1(112.805,80.1)
NetDA33_6: DA33.6 XS1.8 | length 16.6
  Top Layer w0.3: DA33.6@78.765,56.575 78.765,57.737 80.591,59.563 85.776,59.563 85.797,59.542 85.797,53.471 85.79,53.464 XS1.8@85.79,51.87
NetDA33_7: DA33.7 XS1.7 | length 12.8
  Top Layer w0.3: DA33.7@80.035,56.575 80.035,57.609 81.049,58.623 83.896,58.623 84.404,58.115 84.404,55.372 84.023,54.991 84.023,53.467 84.79,52.7 XS1.7@84.79,51.87
NetDA33_8: DA33.8 XS1.6 | length 8.7
  Top Layer w0.3: DA33.8@81.305,56.575 81.712,56.575 81.712,57.191 82.296,57.775 82.906,57.775 83.16,57.521 83.16,53.693 83.79,53.063 XS1.6@83.79,51.87
NetDA33_9: DA33.9 XS1.5 | length 4.8
  Top Layer w0.3: DA33.9@82.575,56.575 82.575,52.984 82.79,52.769 XS1.5@82.79,51.87
NetDA33_14: DA33.14 R14.1 | length 33.8
  Top Layer w0.3: R14.1@72.175,89.1 72.175,89 73.005,88.17 73.005,84.505 72.975,84.475 72.975,83.928 73.25,83.653 73.25,82.718 73.05,82.519 73.05,80.9 73.25,80.7 74.779,80.7 74.925,80.554 74.925,78.5 74.9,78.475 74.9,77.8 v1(73.9,76.8) v1@73.9,76.999 ; v1@83.17,68.65 v1(83.15,68.65) 83.225,68.575 84.725,68.575 85.115,68.185 DA33.14@85.115,66.075
  Bottom Layer w0.3: v1(73.9,76.8) 74.086,76.614 74.985,76.614 75.525,76.074 75.525,75.25 76.675,74.1 77.9,74.1 78.575,73.425 78.575,71.3 81.225,68.65 v1(83.15,68.65)
NetDA33_17: DA33.17 XS1.4 | length 28.2
  Top Layer w0.3: DA33.17@81.305,66.075 81.305,61.366 81.915,60.757 86.436,60.757 88.341,58.852 88.341,51.003 88.138,50.8 81.993,50.8 81.79,51.003 XS1.4@81.79,51.87
NetDA33_18: DA33.18 XS1.3 | length 16
  Top Layer w0.3: DA33.18@80.035,66.075 80.035,59.866 78.207,58.037 78.207,55.27 80.79,52.687 XS1.3@80.79,51.87
NetDA33_19: DA33.19 XS1.2 | length 21.1
  Top Layer w0.3: DA33.19@78.765,66.075 78.765,60.807 75.667,57.709 75.667,51.562 76.403,50.825 79.654,50.825 XS1.2@79.79,51.87
NetDA33_20: DA33.20 XS1.1 | length 19.9
  Top Layer w0.3: DA33.20@77.495,66.075 77.495,67.056 77.724,67.285 79.096,67.285 79.324,67.056 79.324,60.122 76.937,57.734 76.937,55.092 78.79,53.238 XS1.1@78.79,51.87